# EAGLE board Qwiic_Spectral_Sensor-AS726x (EAGLE 7.7.0)
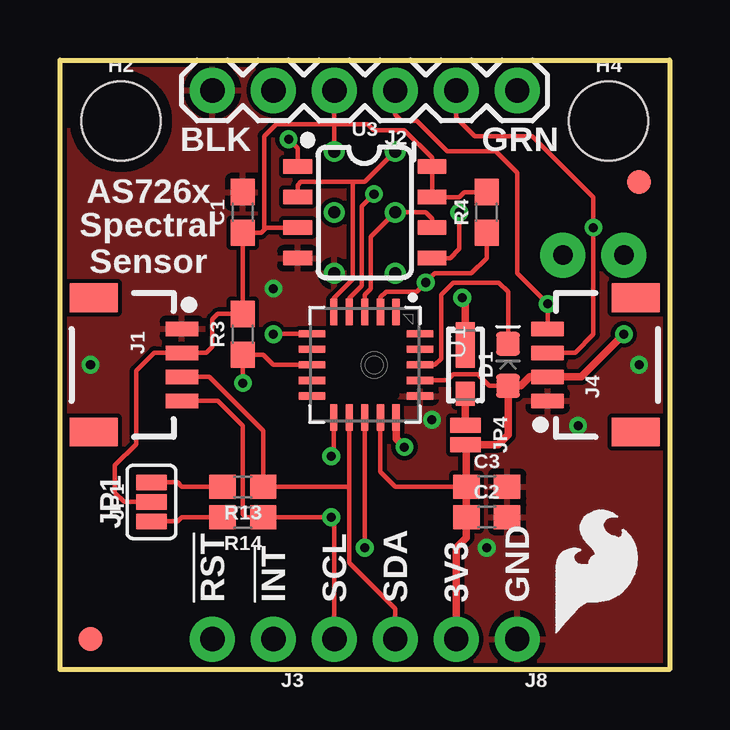
[diagram p0: board, top side]
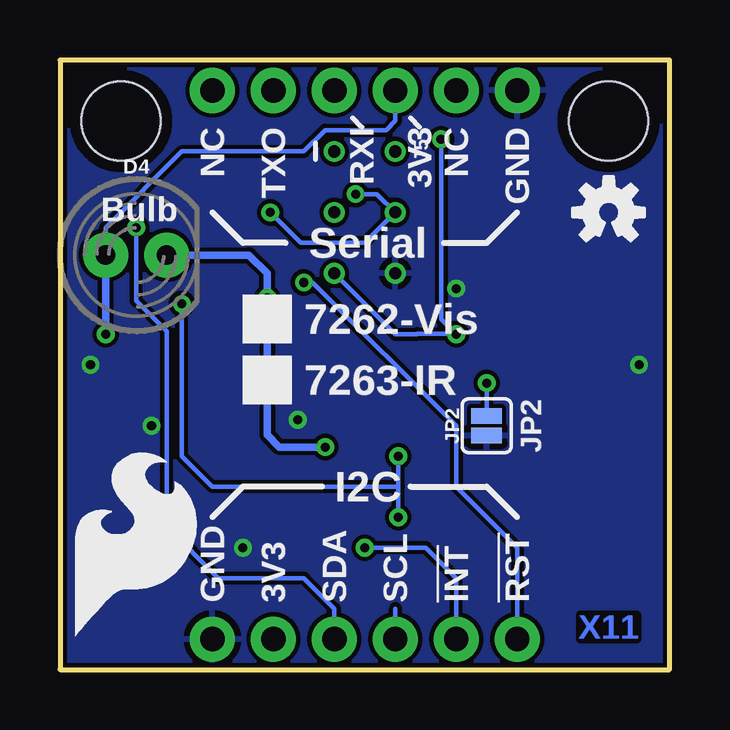
[diagram p1: board, bottom side, seen from below]

Size 25.4 x 25.4 mm. Coordinates in mm from the lower left corner, seen from the top.
Outline: 0,0 0,25.4 25.4,25.4 25.4,0 0,0
Copper layers (1*16): Top 0.035mm / dielectric 1.5mm / Bottom 0.035mm
Design rules "SparkFun-2-layer-TIGHT": minimum track width 7mil, minimum drill 15mil, track to track 7mil, track to pad 7mil, pad to pad 7mil, via to via 7mil, smd to smd 7mil, copper to edge 7mil, drill to drill 7mil, minimum pad ring 7mil, minimum via ring 7mil, stop-mask expansion 4mil, vias tented up to drill 25mil, thermal gap 10mil

## Footprints (pad centres in the part's own frame; a part is rotated, then mirrored left to right if it is on the bottom)
0603 = smd 1.1 x 1: 1 -0.85,0; 2 0.85,0
LED-0603 = smd 1 x 1: A -0.877,0; C 0.877,0
SUPER_BRIGHT_SMD_LED_1206 = smd 1 x 0.8: A -1.2,0 | smd 1.9 x 0.8: C 0.827,0
LED_5MM_NOSILK = drill 0.813 pad 1.88: A -1.27,0; K 1.27,0
FIDUCIAL-1X2 = smd 1 x 1: 1 0,0
STAND-OFF = hole 3.302: 0,0
1X04_1MM_RA = smd 0.6 x 1.35: 1 -1.5,0; 2 -0.5,0; 3 0.5,0; 4 1.5,0 | smd 1.2 x 2: NC1 2.8,-3.675; NC2 -2.8,-3.675
FTDI_BASIC = drill 1.016 pad 1.88: CTS 10.16,0; DTR 0,0; GND 12.7,0; RXI 2.54,0; TXO 5.08,0; VCC 7.62,0
1X02_NO_SILK = drill 1.016 pad 1.88: 1 0,0; 2 2.54,0
2X3_TEST_POINTS = drill 0.508: 1 -2.54,-1.27; 2 -2.54,1.27; 3 0,-1.27; 4 0,1.27; 5 2.54,-1.27; 6 2.54,1.27
1X04_NO_SILK = drill 1.016 pad 1.88: 1 0,0; 2 2.54,0; 3 5.08,0; 4 7.62,0
SMT-JUMPER_3_2-NC_PASTE_SILK = smd 0.635 x 1.27: 1 -0.813,0; 2 0,0; 3 0.813,0
SMT-JUMPER_2_NO_SILK = smd 0.635 x 1.27: 1 -0.406,0; 2 0.406,0
SMT-JUMPER_2_NC_PASTE_NO-SILK = smd 0.635 x 1.27: 1 -0.406,0; 2 0.406,0
LGA20 = smd 1.1 x 0.3: 1 -2.2,1.3; 2 -2.2,0.65; 3 -2.2,0; 4 -2.2,-0.65; 5 -2.2,-1.3; 11 2.2,-1.3; 12 2.2,-0.65; 13 2.2,0; 14 2.2,0.65; 15 2.2,1.3 | smd 0.3 x 1.1: 6 -1.3,-2.2; 7 -0.65,-2.2; 8 0,-2.2; 9 0.65,-2.2; 10 1.3,-2.2; 16 1.3,2.3; 17 0.65,2.3; 18 0,2.3; 19 -0.65,2.3; 20 -1.3,2.3
SO08 = smd 0.6 x 1.2: 1 -1.905,-2.8; 2 -0.635,-2.8; 3 0.635,-2.8; 4 1.905,-2.8; 5 1.905,2.8; 6 0.635,2.8; 7 -0.635,2.8; 8 -1.905,2.8

## Placement (x,y rotation side)
C1  1.0uF  [0603]  7.62,19.05 90 top
C2  1.0uF  [0603]  17.78,6.35 0 top
C3  10uF  [0603]  17.78,7.62 0 top
D1  BLUE  [LED-0603]  18.67,12.7 90 top
D2  5700k  [SUPER_BRIGHT_SMD_LED_1206]  16.89,12.7 90 top
D4  Incandescent  [LED_5MM_NOSILK]  22.23,17.27 0 bottom
FD1  FIDUCIAL1X2  [FIDUCIAL-1X2]  1.27,1.27 0 top
FD2  FIDUCIAL1X2  [FIDUCIAL-1X2]  24.13,20.32 0 top
FRAME1  FRAME-LETTER  [CREATIVE_COMMONS]  -13.97,-21.59 0 top  (outside the outline)
H2  STAND-OFF  [STAND-OFF]  2.54,22.86 0 top
H4  STAND-OFF  [STAND-OFF]  22.86,22.86 0 top
J1  [1X04_1MM_RA]  5.08,12.7 270 top
J2  Serial Interface  [FTDI_BASIC]  19.05,24.13 180 top
J3  [1X02_NO_SILK]  8.89,1.27 180 top
J4  [1X04_1MM_RA]  20.32,12.7 90 top
J5  Flash Programming  [2X3_TEST_POINTS]  12.7,19.05 270 bottom
J8  [1X04_NO_SILK]  19.05,1.27 180 top
JP1  [SMT-JUMPER_3_2-NC_PASTE_SILK]  3.81,6.99 90 top
JP2  [SMT-JUMPER_2_NO_SILK]  7.62,10.16 90 bottom
JP4  [SMT-JUMPER_2_NC_PASTE_NO-SILK]  16.89,9.78 270 top
LOGO1  SFE_LOGO_NAME_FLAME.1_INCH  [SFE_LOGO_NAME_FLAME_.1]  -35.18,-30.48 0 top  (outside the outline)
LOGO4  OSHW-LOGOS  [OSHW-LOGO-S]  2.54,19.05 0 bottom
R3  10k  [0603]  7.62,13.97 90 top
R4  10k  [0603]  17.78,19.05 90 top
R13  4.7k  [0603]  7.62,7.62 180 top
R14  4.7k  [0603]  7.62,6.35 180 top
U1  AS726X  [LGA20]  12.7,12.7 270 top
U3  4MB Flash  [SO08]  12.7,19.05 270 top
U$1  [SFE_LOGO_FLAME_.2]  20.32,1.27 0 top
U$2  [REVISION]  -2.54,-24.13 0 top  (outside the outline)
U$3  [SFE_LOGO_FLAME_.1]  21.72,2.67 0 top
U$4  [SFE_LOGO_FLAME_.3]  25.27,1.27 0 bottom

## Library data of the parts
C1 C2 = SparkFun-Capacitors; PROD_ID: CAP-00868
C3 = SparkFun-Capacitors; PROD_ID: CAP-11015
D1 = SparkFun-LED; PROD_ID: DIO-08575
D2 D4 J1 J4 U1 = SparkX
FD1 FD2 FRAME1 LOGO1 LOGO4 U$1-U$4 = SparkFun-Aesthetics
H2 H4 = SparkFun-Hardware
J2 J3 J5 J8 = SparkFun-Connectors
JP1 JP2 JP4 = SparkFun-Jumpers
R3 R4 = SparkFun-Resistors; PROD_ID: RES-00824
R13 R14 = SparkFun-Resistors; PROD_ID: RES-07857
U3 = SparkFun-IC-Memory; PROD_ID: IC-12455

## Nets
3.3V: C1.1 C2.1 C3.1 D1.A D4.A J1.2 J2.VCC J4.2 J5.2 J8.2 JP1.2 JP4.2 R3.2 R4.2 U1.14 U1.17 U3.3 U3.7 U3.8
!CS_EE: J5.5 U1.6 U3.1
!INT: J3.1 U1.13
!RST: J3.2 R4.1 U1.2
GND: C1.2 C2.2 C3.2 J1.1 J2.GND J4.1 J5.6 J8.1 JP2.1 U1.16 U3.4
LED_DRV: D2.C D4.K U1.15
MISO: J5.1 U1.5 U3.2
MOSI: J5.4 U1.4 U3.5
N$1: JP2.2 R3.1 U1.8
N$2: D1.C U1.18
N$4: JP1.3 R13.2
N$5: JP1.1 R14.2
N$6: D2.A JP4.1
RX/SCL: J1.4 J2.TXO J4.4 J8.4 R14.1 U1.11
SCK: J5.3 U1.3 U3.6
TX/SDA: J1.3 J2.RXI J4.3 J8.3 R13.1 U1.12

## Tracks (layer width: path | path; a pad name or v marks a point on that pad's centre or on a via)
3.3V  (via drill 0.38)
  Top 0.178: C3.1 13.97,7.62 13.35,8.24 U1.14 | U3.3 8.6,18.41 8.51,18.33 | R4.2 16.85,19.9 16.64,19.68 U3.7 U3.8 15.5,21.33 14.35,22.48 13.08,22.48 12.83,22.73 11.43,22.73 | 8.51,18.33 8.51,22.23 9.02,22.73 11.43,22.73 | 8.51,18.33 8.38,18.2 C1.1 R3.2 6.57,14.82 6.35,14.61 6.35,13.46 6.09,13.2 J1.2 3.94,13.21 3.17,12.45 3.17,9.4 2.29,8.51 2.29,7.37 2.67,6.99 JP1.2 | J2.VCC 11.43,22.73 | 11.43,22.73 J5.2 | J4.2 | U1.17 16.13,12.05 16.38,12.31 17.4,12.31 17.88,11.82 D1.A
  Top 0.305: J8.2 16.51,5.08 16.93,5.5 C2.1 C3.1 16.93,9.33 JP4.2 18.26,9.37 18.67,9.78 D1.A 19.19,11.82 19.57,12.2 J4.2 21.73,12.2 v23.5,13.97
  Bottom 0.178: D4.A 23.5,18.41 20.32,21.59 15.24,21.59 14.35,22.48 11.81,22.48 11.43,22.86 J2.VCC
  Bottom 0.305: v23.5,13.97 D4.A
!CS_EE  (via drill 0.38)
  Top 0.178: U3.1 9.9,21.72 v9.53,22.1 | U1.6 8.92,14 v8.89,13.97
  Bottom 0.178: v9.53,22.1 9.53,14.61 v8.89,13.97 8.92,14 U1.6 10.53,13.97 11.43,13.97 J5.5
!INT  (via drill 0.38)
  Top 0.178: U1.13 v12.7,5.08
  Bottom 0.178: J3.1 8.89,3.81 10.16,5.08 v12.7,5.08
!RST  (via drill 0.38)
  Top 0.178: U1.2 13.35,15.51 13.59,15.75 14.86,15.75 v15.24,16.13 15.62,16.51 17.14,16.51 17.78,17.14 R4.1
  Bottom 0.178: v15.24,16.13 14.86,16.13 8.89,10.16 8.89,7.62 6.35,5.08 J3.2
GND  (via drill 0.38)
  other vias: 15.49,10.41 8.89,15.88 1.27,12.7 24.13,12.7 21.59,10.16 17.78,5.08
  pour Top (isolate 0.178): 0,0 25.4,0 25.4,25.4 0,25.4
  pour Bottom (isolate 0.178): 0,25.4 25.4,25.4 25.4,0 0,0
LED_DRV  (via drill 0.38)
  Top 0.305: U1.15 14,9.62 v14.35,9.27 | D2.C 16.89,15.37 v16.76,15.49
  Bottom 0.305: v14.35,9.27 16.26,9.27 16.76,9.78 v16.76,15.49 16.76,16.51 17.53,17.27 D4.K
MISO
  Top 0.178: 12.19,20.32 12.19,16.26 11.4,15.46 U1.5 | U3.2 9.9,20.19 10.03,20.32 12.19,20.32 | 12.19,20.32 12.7,20.32 J5.1
MOSI  (via drill 0.38)
  Top 0.178: U1.4 12.05,15.48 12.57,16 12.57,19.3 v13.08,19.81 | U3.5 16.26,17.14 16.64,17.53 v16.64,19.05
  Bottom 0.178: v13.08,19.81 12.19,19.81 J5.4 12.7,17.78 15.37,17.78 v16.64,19.05
N$1  (via drill 0.38)
  Top 0.178: U1.8 8.89,12.7 8.47,13.12 R3.1 v7.62,11.94
  Bottom 0.178: v7.62,11.94 JP2.2
N$2
  Top 0.178: U1.18 15.62,12.7 15.88,12.95 15.88,15.62 16.38,16.13 18.29,16.13 18.67,15.75 D1.C
N$4
  Top 0.178: R13.2 5.08,7.62 4.9,7.8 JP1.3
N$5
  Top 0.178: R14.2 5.08,6.35 4.9,6.17 JP1.1
N$6
  Top 0.305: JP4.1 D2.A
RX/SCL  (via drill 0.38)
  Top 0.178: J4.4 v20.32,15.24 19.05,16.51 19.05,20.7 18.16,21.59 16.13,21.59 14.86,22.86 14.22,22.86 13.97,23.11 J2.TXO | J1.4 6.58,11.2 7.62,10.16 7.62,6.48 7.75,6.35 R14.1 v11.3,6.35 11.43,6.22 J8.4 | U1.11 11.4,8.99 v11.3,8.89
  Bottom 0.178: 11.3,7.62 19.05,7.62 20.32,8.89 v20.32,15.24 | J8.4 11.43,2.54 | v11.3,6.35 11.3,7.62 | 11.3,7.62 v11.3,8.89
SCK
  Top 0.178: U1.3 12.7,15.62 12.95,15.88 12.95,18.03 J5.3 15.24,19.05 15.5,18.79 U3.6
TX/SDA  (via drill 0.38)
  Top 0.178: U1.12 12.05,7.62 | 12.05,7.62 12.05,4.46 13.97,2.54 J8.3 | J2.RXI 16.51,22.99 17.27,22.23 19.68,22.23 22.23,19.68 v22.23,18.41 22.23,13.97 21.46,13.21 J4.3 | 12.05,7.62 R13.1 8.47,9.95 6.21,12.2 J1.3
  Bottom 0.178: J8.3 13.97,2.54 15.24,3.81 18.8,3.81 20.95,5.97 20.95,14.1 22.23,15.37 v22.23,18.41

## Text on the board
Bottom: X11
tPlace: BLK | GRN | AS726x | Spectral / Sensor | JP1 | !RST | !INT | SCL | SDA | 3V3 | GND | Andrew England
bPlace: GND | NC | 3V3 | RXI | TXO | NC | Bulb | Serial | 7262-Vis | 7263-IR | JP2 | I2C | !RST | !INT | SCL | SDA | 3V3 | GND
tValues: 5700K
tDocu: Nathan Seidle